# Allegro board PLL.brd
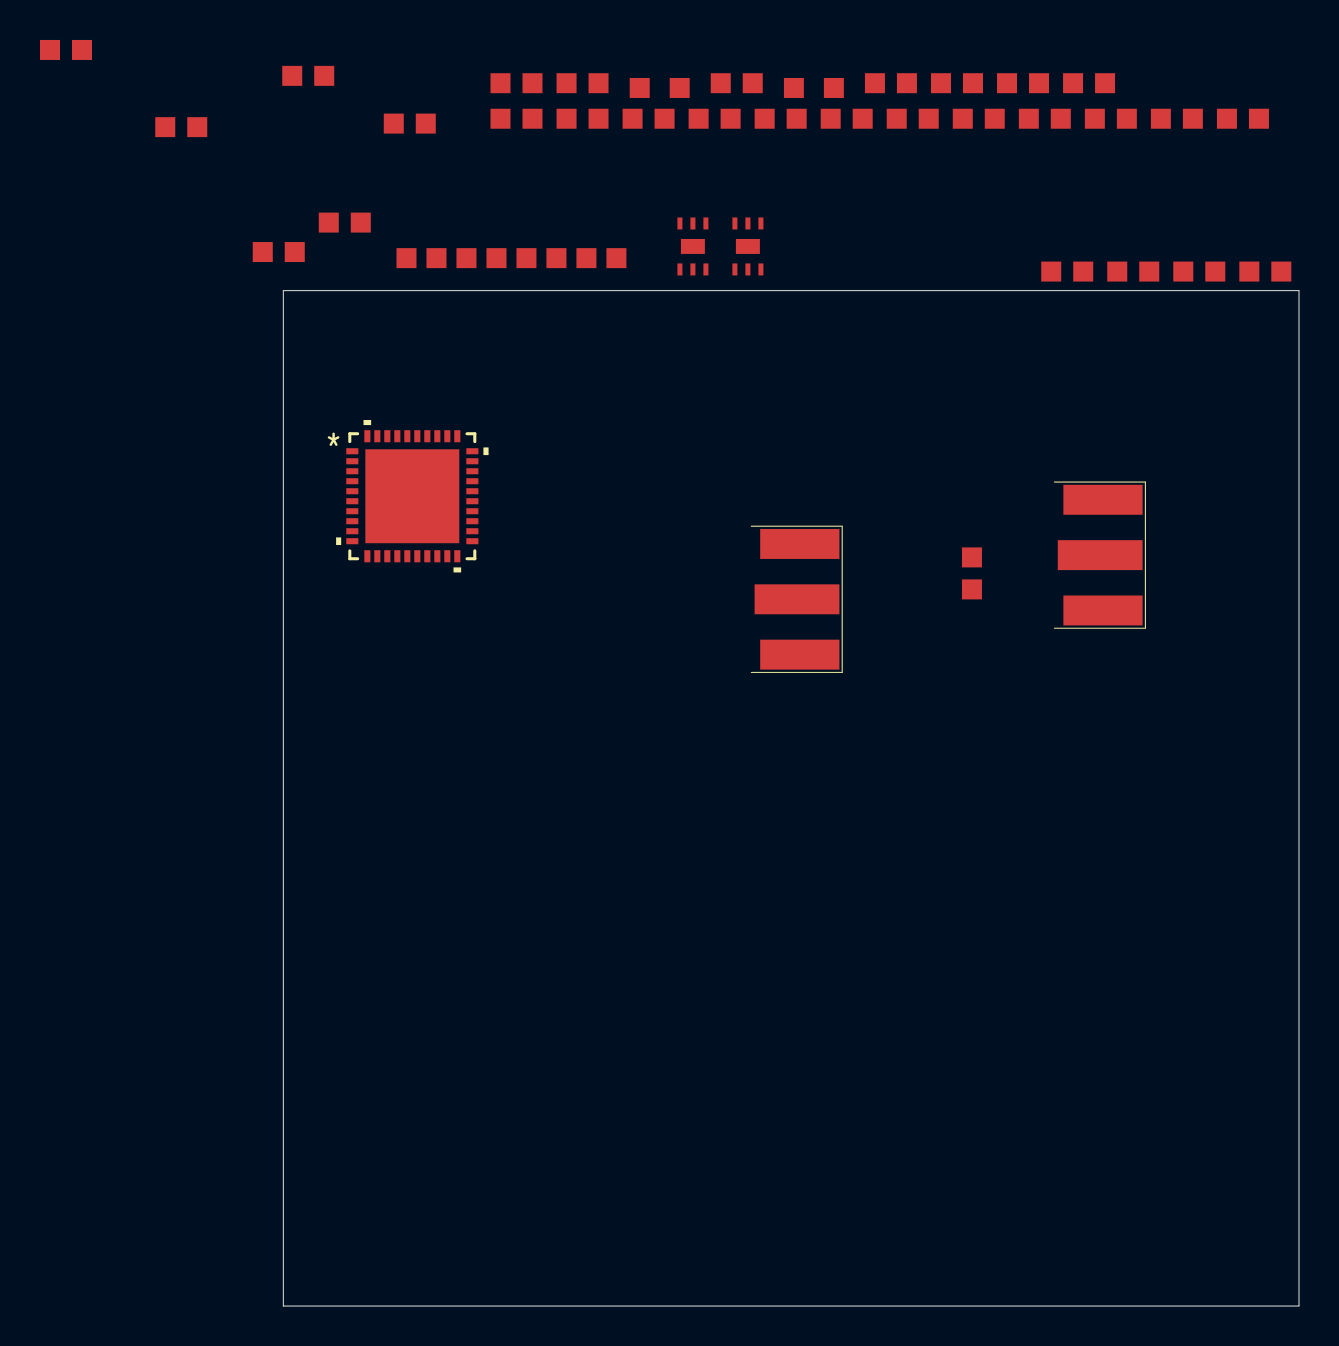
[diagram p0: board, top side]
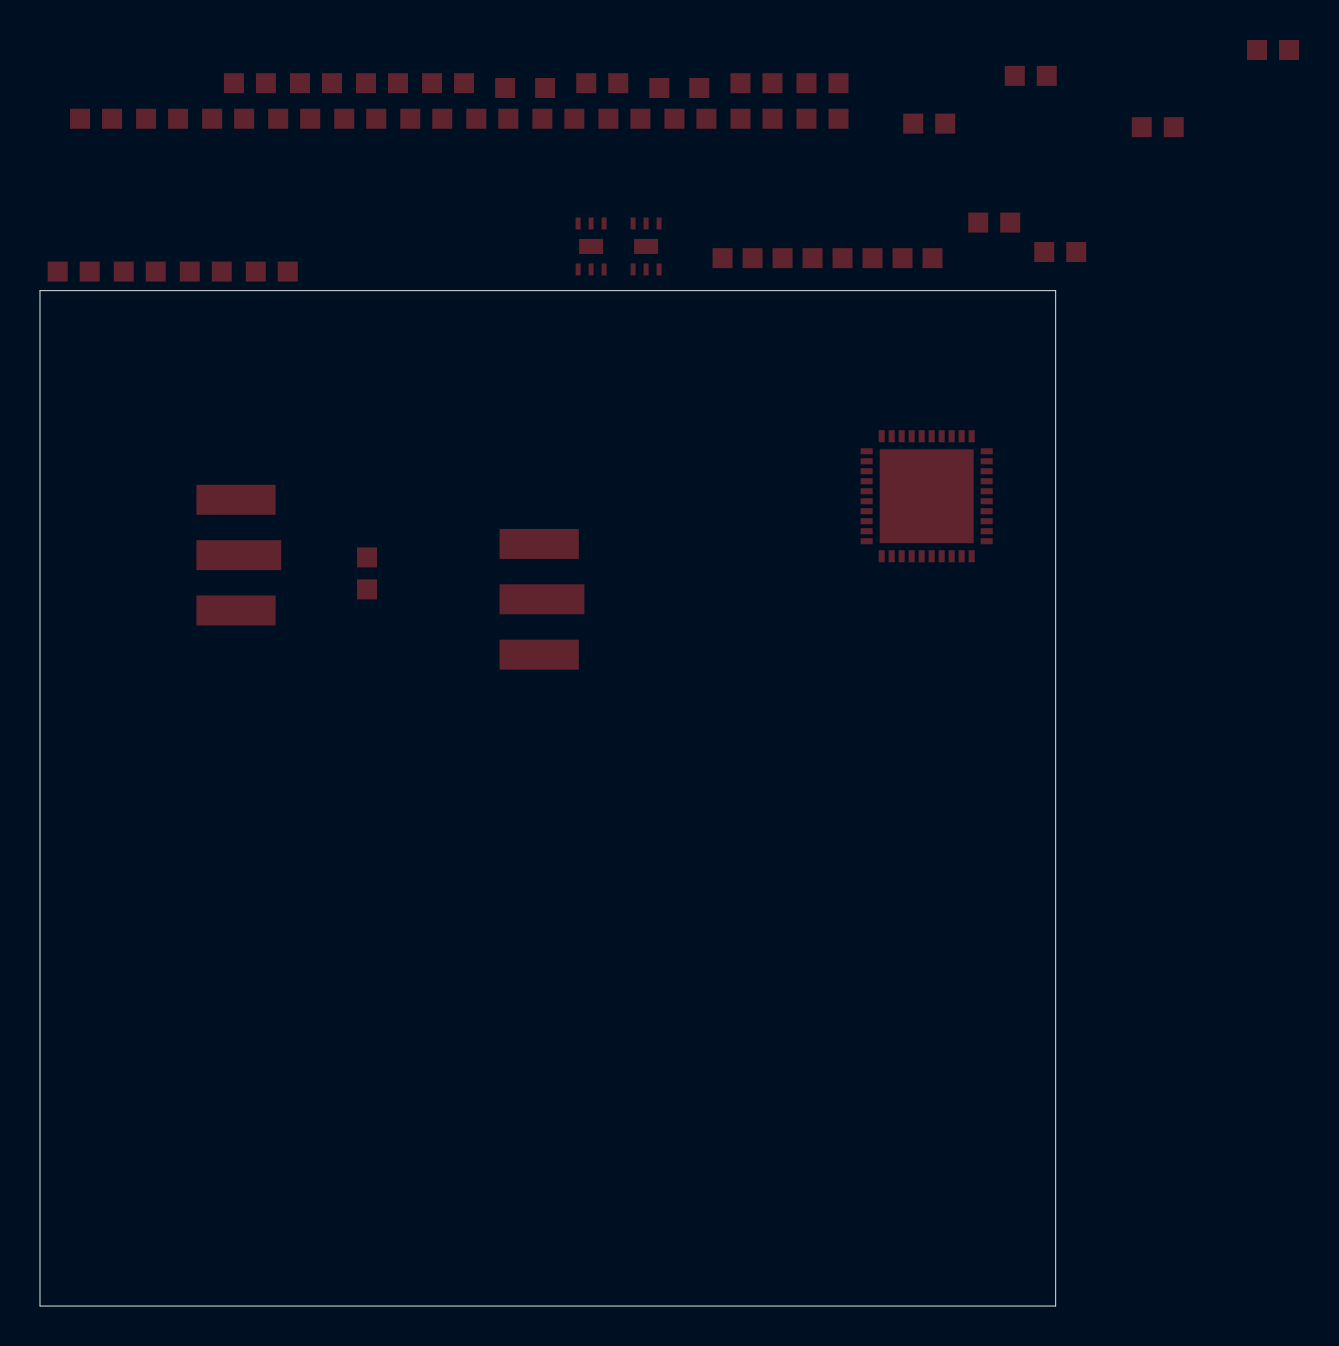
[diagram p1: board, bottom side, seen from below]

Outline 50.8 x 50.8 mm; copper layers: TOP, BOTTOM. Coordinates in mm from the lower left corner of the outline.
Outline path: 0,50.8 50.8,50.8 50.8,0 0,0 0,50.8

## Placement (name value [footprint] x y rotation side)
5V  HEADER 2  [HEADER2]  18.82 60.94 0 top
C1  CAP  [CAPC1608N]  1.24 61.54 0 top
C2  4.5uF  [CAPC1608N]  44.69 59.4 0 top
C3  0.1uF  [CAPC1608N]  14.97 61.18 0 top
C4  0.1uF  [CAPC1608N]  -10.87 62.84 0 top
C5  1uF  [CAPC1608N]  45.81 51.75 0 top
C6  0.1uF  [CAPC1608N]  24.87 59.4 0 top
C7  0.1uF  [CAPC1608N]  22.68 61.18 0 top
C8  0.001uF  [CAPC1608N]  34.78 59.4 0 top
C9  CAP  [CAPC1608N]  14.97 59.4 0 top
C10  CAP  [CAPC1608N]  28.18 59.4 0 top
C11  1uF  [CAPC1608N]  18.27 59.4 0 top
C12  1uF  [CAPC1608N]  39.21 51.75 0 top
C13  CAP  [CAPC1608N]  21.57 59.4 0 top
C14  0.1uF  [CAPC1608N]  -0.23 52.73 0 top
C15  0.1uF  [CAPC1608N]  49.11 51.75 0 top
C16  0.001uF  [CAPC1608N]  31.48 59.4 0 top
C17  100pF  [CAPC1608N]  38.09 59.4 0 top
C18  1uF  [CAPC1608N]  42.51 51.75 0 top
C19  0.1uF  [CAPC1608N]  3.07 54.2 0 top
C20  100pF  [CAPC1608N]  41.39 59.4 0 top
C21  10pF  [CAPC1608N]  48 59.4 0 top
C22  0.1uF  [CAPC1608N]  6.32 59.16 0 top
C23  4.7uF  [CAPC1608N]  -5.11 58.98 0 top
C24  0.1uF  [CAPC1608N]  11.66 59.4 0 top
C25  0.1uF  [CAPC1608N]  11.66 61.18 0 top
C26  1uF  [CAPC1608N]  34.44 36.65 90 top
GPIO_SPI  GPIO_SPI  [HEADER8]  10.16 52.43 0 top
J1  SMA_3  [SMA_AMPHENOL_S]  38.73 37.57 0 top
J2  SMA_3  [SMA_AMPHENOL_S]  23.57 35.36 0 top
LP5900_3V3_A  LP5900  [SMP6_1_2]  20.49 53.01 0 top
LP5900_3V3_D  LP5900  [SMP6_1_2]  23.24 53.01 0 top
PLL  hmc701  [HCP_40_1]  6.45 40.51 0 top
PLL_OUT  CON2  [HEADER2]  26.54 60.94 0 top
R1  10K  [CAPC1608N]  30.39 61.18 0 top
R2  51  [CAPC1608N]  37 61.18 0 top
R3  0  [CAPC1608N]  40.3 61.18 0 top
R4  10K  [CAPC1608N]  33.69 61.18 0 top

## Library data of the parts
5V = HEADER 2
C1-C26 = CAP
GPIO_SPI = 8 HEADER
J1 J2 = SMA_3
LP5900_3V3_A LP5900_3V3_D = lp5900
PLL = hmc701
PLL_OUT = CON2
R1-R4 = RES

## Footprints (pads in the part's own frame, mm; a bottom-side part is the same pattern mirrored in y, then rotated)
CAPC1608N
  rect 1x1 smd: 1(-0.8,0) 2(0.8,0)
HCP_40_1
  rect 0.605x0.305 smd: 1(-3.002,2.25) 2(-3.002,1.75) 3(-3.002,1.25) 4(-3.002,0.75) 5(-3.002,0.25) 6(-3.002,-0.25) 7(-3.002,-0.75) 8(-3.002,-1.25) 9(-3.002,-1.75) 10(-3.002,-2.25) 21(3.002,-2.25) 22(3.002,-1.75) 23(3.002,-1.25) 24(3.002,-0.75) 25(3.002,-0.25) 26(3.002,0.25) 27(3.002,0.75) 28(3.002,1.25) 29(3.002,1.75) 30(3.002,2.25)
  rect 0.305x0.605 smd: 11(-2.25,-3.002) 12(-1.75,-3.002) 13(-1.25,-3.002) 14(-0.75,-3.002) 15(-0.25,-3.002) 16(0.25,-3.002) 17(0.75,-3.002) 18(1.25,-3.002) 19(1.75,-3.002) 20(2.25,-3.002) 31(2.25,3.002) 32(1.75,3.002) 33(1.25,3.002) 34(0.75,3.002) 35(0.25,3.002) 36(-0.25,3.002) 37(-0.75,3.002) 38(-1.25,3.002) 39(-1.75,3.002) 40(-2.25,3.002)
  rect 4.7x4.7 smd: 41(0,0)
HEADER2
  rect 1x1 smd: 1(-1,0) 2(1,0)
HEADER8
  rect 1x1 smd: 1(-4,0) 2(-2.5,0) 3(-1,0) 4(0.5,0) 5(2,0) 6(3.5,0) 7(5,0) 8(6.5,0)
SMA_AMPHENOL_S
  rect 3.962x1.499 smd: 1(2.261,2.769) 3(2.261,-2.769)
  rect 4.242x1.499 smd: 2(2.121,0)
SMP6_1_2
  rect 0.25x0.6 smd: 1(-0.65,-1.15) 2(0,-1.15) 3(0.65,-1.15) 4(0.65,1.15) 5(0,1.15) 6(-0.65,1.15)
  rect 1.2x0.75 smd: 7(0,0)

## Nets
3VANALOG: C1.2(B) C16.1(A) C21.2(B) C22.2(B) C25.2(B) C26.2(B) LP5900_3V3_A.1(OUT) PLL.1(VCCPRS) PLL.16(RVDD) PLL.39(VCCHF) R3.2(B)
3VDIGITAL: C4.2(B) C5.2(B) C11.1(A) C18.2(B) C19.2(B) LP5900_3V3_D.1(OUT) PLL.22(DVDD1) PLL.34(DVDIO) PLL.35(DVDD2) PLL.36(DVDDQ)
+5V: 5V.1 C2.2(B) C3.2(B) C9.2(B) C10.2(B) C12.2(B) C13.2(B) C14.2(B) C15.2(B) C23.2(B) C24.2(B) LP5900_3V3_A.6(IN) LP5900_3V3_D.6(IN) PLL.2(VCCOA) PLL.3(VPPCP) PLL.7(VPPDRV) PLL.8(VDDPD) PLL.11(VDDPDV) PLL.13(VDDPDR) R1.2(B) R4.2(B)
GND: 5V.2 C1.1(A) C2.1(A) C3.1(A) C4.1(A) C5.1(A) C8.1(A) C9.1(A) C10.1(A) C11.2(B) C12.1(A) C13.1(A) C14.1(A) C15.1(A) C18.1(A) C19.1(A) C20.1(A) C21.1(A) C22.1(A) C23.1(A) C24.1(A) C25.1(A) C26.1(A) GPIO_SPI.8 J1.1 J1.3 J2.1 J2.3 LP5900_3V3_A.3(GND) LP5900_3V3_D.3(GND) PLL.5(GNDCP) PLL.6(GNDDRV) PLL.9(GNDPD) PLL.12(GNDPDV) PLL.14(GNDPDR) PLL.41(GND) PLL_OUT.2 R2.1(A)
GP01: GPIO_SPI.1 PLL.23(GP01)
GP02: GPIO_SPI.2 PLL.24(GP02)
GP03: GPIO_SPI.3 PLL.25(GP03)
LO_IN: C7.1(A) J1.2
PLL_OUT: PLL.4(CP) PLL_OUT.1
SCK: GPIO_SPI.6 PLL.29(SCK)
SDI: GPIO_SPI.5 PLL.28(SDI)
SDO: GPIO_SPI.7 PLL.33(LD_SDO)
SEN: GPIO_SPI.4 PLL.27(SEN)
VCOIP: C17.1(A) J2.2
N54165: C20.2(B) PLL.38(VCOIN)
N54173: C17.2(B) PLL.37(VCOIP)
N54407: PLL.10(N/C1) R3.1(A)
N54561: C8.2(B) PLL.18(REFCAP)
N54573: C6.2(B) C7.2(B) PLL.17(XSIN)
N55151: LP5900_3V3_D.4(EN) R1.1(A)
N76218: LP5900_3V3_A.4(EN) R4.1(A)
N539031: C16.2(B) PLL.40(BIAS)
N542010: C6.1(A) R2.2(B)

Pads without a net: LP5900_3V3_A 2 5 7; LP5900_3V3_D 2 5 7; PLL 15 19 20 21 26 30 31 32
